# Altium PCB DSP5509_CIII.PcbDoc
Units mil, origin at the board's own origin, x right, y up, seen from the top; angles counter-clockwise.
Board outline 6000 x 4000 mil, 2 copper layers (Top Layer, Bottom Layer); 301 components, 272 nets, 1049 pads, 16 vias.
Unrouted connection lines stored in the file: 717.
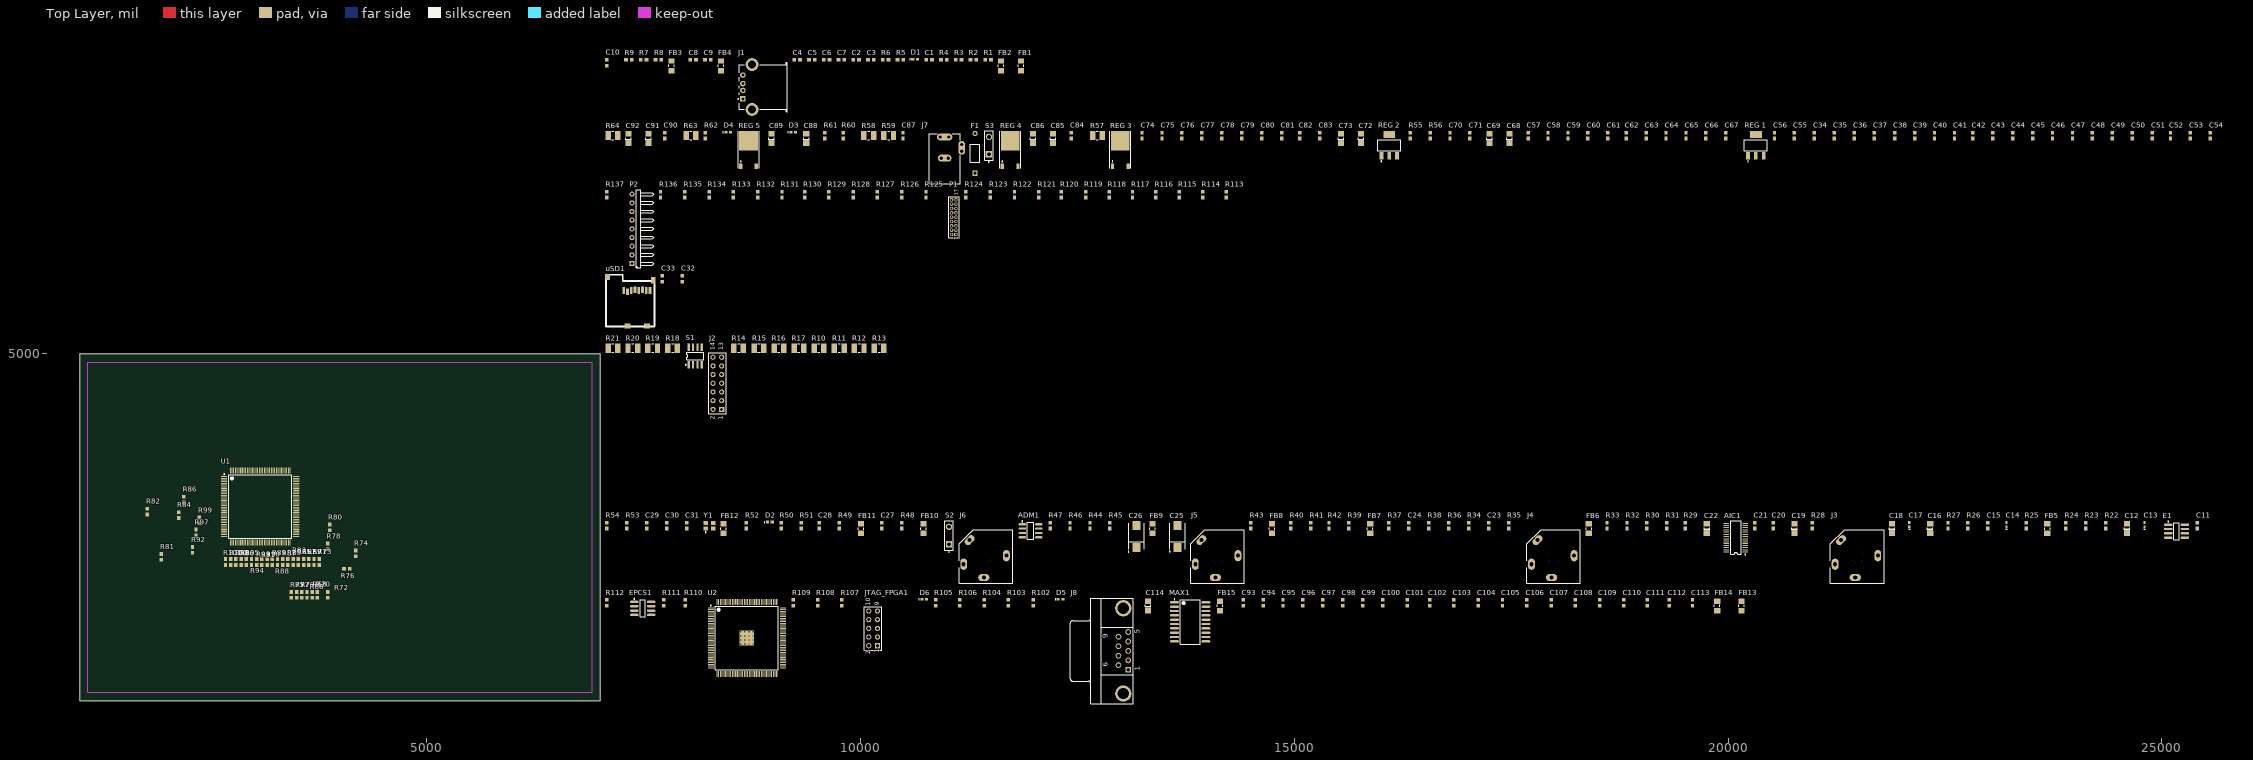
[diagram p0: Top Layer view]
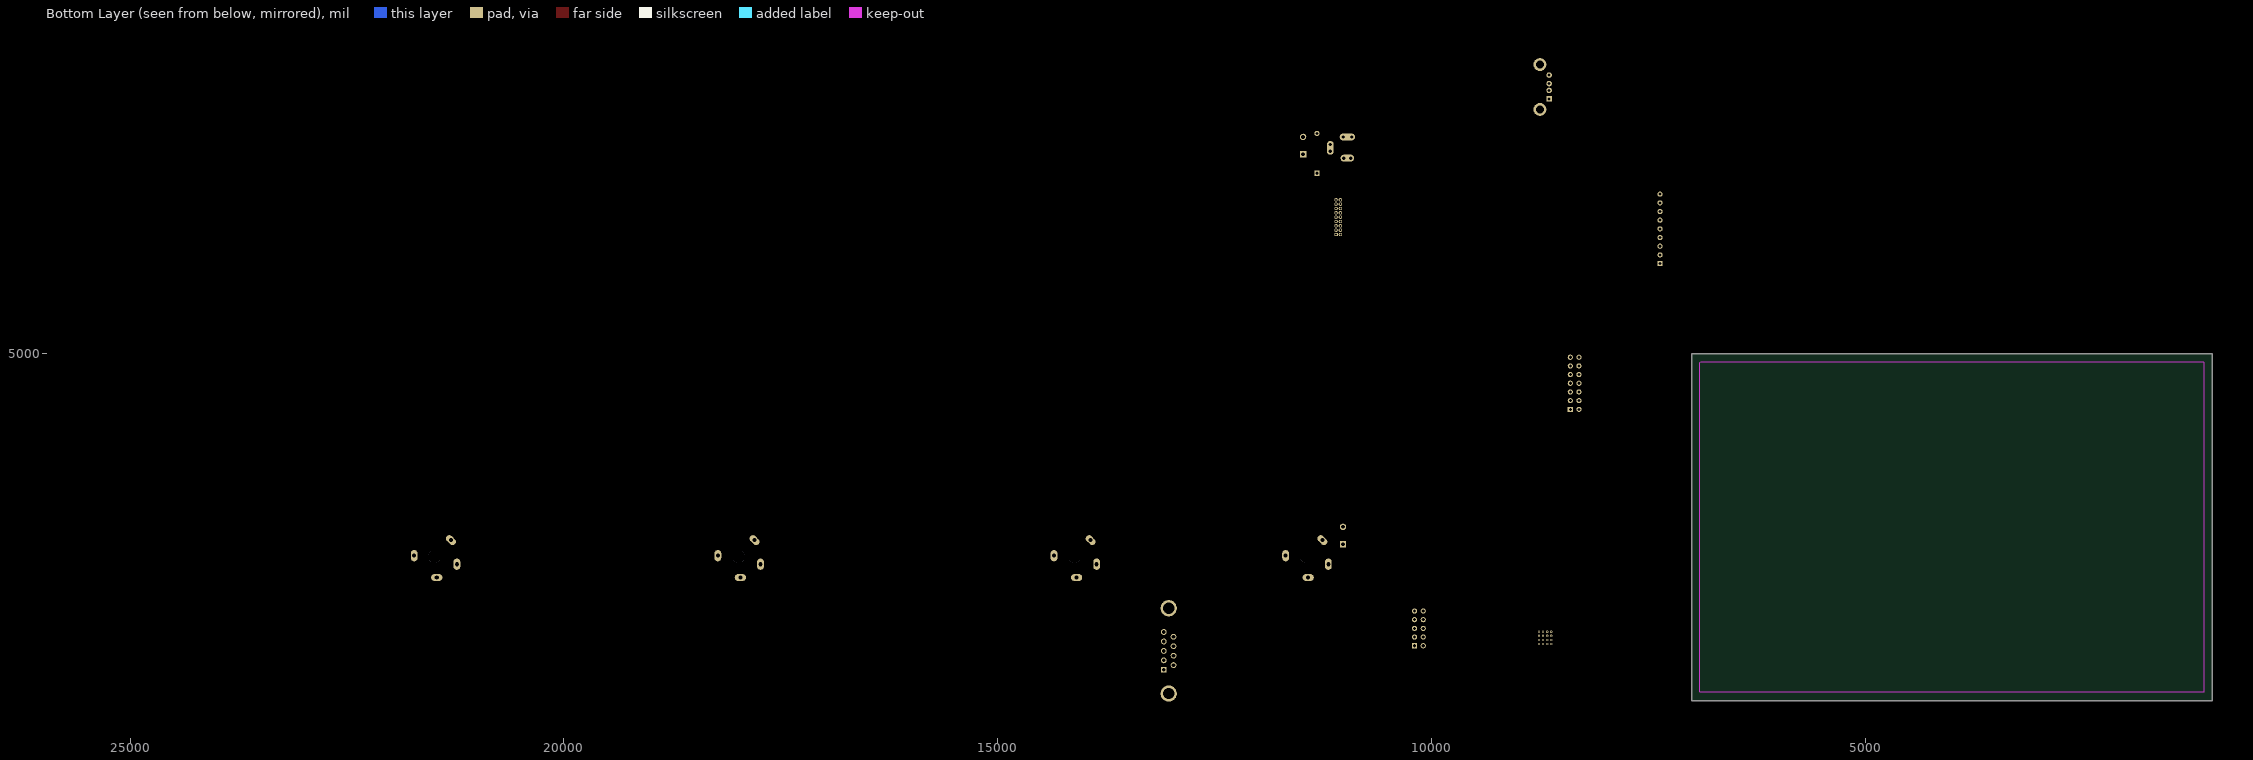
[diagram p1: Bottom Layer view, seen from below]

## Layer stack, top to bottom
Top Layer: signal copper 1.4
Dielectric: dielectric 12.6, FR-4, Dk 4.8
Bottom Layer: signal copper 1.4

## Board outline
1000,1000 7000,1000 7000,5000 1000,5000

## Design rules (kind name [scope] priority, off if disabled: settings)
Clearance [All] p1: gap=10
PolygonConnect [All] p1: connectstyle=Relief reliefconductorwidth=10 reliefentries=4 polygonreliefangle="90 Angle"
RoomDefinition USB [InComponentClass('USB')] p1: confinementstyle=ConfineIn formatcopy=TRUE lockcomponents=FALSE outline 7045,7730 11980,7730 11980,8520 7045,8520
RoomDefinition power [InComponentClass('power')] p2: confinementstyle=ConfineIn formatcopy=TRUE lockcomponents=FALSE outline 7045,6950 25725,6950 25725,7680 7045,7680
RoomDefinition output [InComponentClass('output')] p3: confinementstyle=ConfineIn formatcopy=TRUE lockcomponents=FALSE outline 7045,5980 14420,5980 14420,7000 7045,7000
RoomDefinition MMC [InComponentClass('MMC')] p4: confinementstyle=ConfineIn formatcopy=TRUE lockcomponents=FALSE outline 7045,5280 8110,5280 8110,6030 7045,6030
RoomDefinition JTAG_DSP [InComponentClass('JTAG_DSP')] p5: confinementstyle=ConfineIn formatcopy=TRUE lockcomponents=FALSE outline 7045,4225 10315,4225 10315,5230 7045,5230
RoomDefinition INTERFACE [InComponentClass('INTERFACE')] p6: confinementstyle=ConfineIn formatcopy=TRUE lockcomponents=FALSE outline 7045,3235 16520,3235 16520,4275 7045,4275
RoomDefinition INT_Reset_CLK [InComponentClass('INT_Reset_CLK')] p7: confinementstyle=ConfineIn formatcopy=TRUE lockcomponents=FALSE outline 7045,2345 25545,2345 25545,3185 7045,3185
RoomDefinition FPGA_JTAG [InComponentClass('FPGA_JTAG')] p8: confinementstyle=ConfineIn formatcopy=TRUE lockcomponents=FALSE outline 7045,955 20355,955 20355,7000 7045,7000
RoutingVias [All] p1: holewidth=28 width=50 viastyle="Through Hole" minholewidth=28 minwidth=50 maxholewidth=28 maxwidth=50
SolderMaskExpansion [All] p1: expansion=4
TestPointUsage [All] p1: valid=0 allowmultiple=FALSE
Testpoint [All] p1: side=15 testpointundercomponent=TRUE minsize=40 maxsize=100 preferedsize=60 minholesize=0 maxholesize=40 preferedholesize=32 testpointgrid=1 style=1023 order=0-112345678
Width [All] p1: maxlimit=10 minlimit=10 preferedwidth=10
19 further rules are at their usual default settings.

## Classes and differential pairs
component class FPGA_JTAG: C93 C94 C95 C96 C97 C98 C99 C100 C101 C102 C103 C104 C105 C106 C107 C108 C109 C110 C111 C112 C113 C114 D5 D6 EPCS1 FB13 FB14 FB15 J8 JTAG_FPGA1 MAX1 MAX233 R102 R103 R104 R105 R106 R107 R108 R109 R110 R111 R112 R113 R114 R115 R116 R117 R118 R119 U2
component class INT_Reset_CLK: ADM1 AIC1 C11 C12 C13 C14 C15 C16 C17 C18 C19 C20 C21 C22 C23 C24 C25 C26 C27 C28 C29 C30 C31 D2 E1 FB5 FB6 FB7 FB8 FB9 FB10 FB11 FB12 J3 J4 J5 J6 R22 R23 R24 R25 R26 R27 R28 R29 R30 R31 R32 R33 R34 R35 R36 R37 R38 R39 R40 R41 R42 R43 R44 R45 R46 R47 R48 R49 R50 R51 R52 R53 R54 S2 Y1
component class INTERFACE: R65 R66 R67 R68 R69 R70 R71 R72 R73 R74 R75 R76 R77 R78 R79 R80 R81 R82 R83 R84 R85 R86 R87 R88 R89 R90 R91 R92 R93 R94 R95 R96 R97 R98 R99 R100 R101 U1
component class JTAG_DSP: J2 R10 R11 R12 R13 R14 R15 R16 R17 R18 R19 R20 R21 S1
component class MMC: C32 C33 uSD1
component class output: P1 P2 R113 R114 R115 R116 R117 R118 R119 R120 R121 R122 R123 R124 R125 R126 R127 R128 R129 R130 R131 R132 R133 R134 R135 R136 R137 R138 R139 R140 R141 R142 R143 R144
component class power: C34 C35 C36 C37 C38 C39 C40 C41 C42 C43 C44 C45 C46 C47 C48 C49 C50 C51 C52 C53 C54 C55 C56 C57 C58 C59 C60 C61 C62 C63 C64 C65 C66 C67 C68 C69 C70 C71 C72 C73 C74 C75 C76 C77 C78 C79 C80 C81 C82 C83 C84 C85 C86 C87 C88 C89 C90 C91 C92 D3 D4 F1 J7 R55 R56 R57 R58 R59 R60 R61 R62 R63 R64 "REG 1" "REG 2" "REG 3" "REG 4" "REG 5" S3
component class USB: C1 C2 C3 C4 C5 C6 C7 C8 C9 C10 D1 FB1 FB2 FB3 FB4 J1 R1 R2 R3 R4 R5 R6 R7 R8 R9

## Components (designator, comment, footprint, x,y, rotation, side; value= is the part's Value field where it differs from the comment)
ADM1 "ADM706RAR" R-8_N 11960,2960 r0 top
AIC1 "TLV320AIC23BIPW" TSSOP28 20090,2880 r90 top
C1 "Cap Semi" 1608[0603] 10790,8390 r0 top
C2 "Cap Semi" 1608[0603] 9950,8390 r0 top
C3 "Cap Semi" 1608[0603] 10120,8390 r0 top
C4 "Cap Semi" 1608[0603] 9270,8390 r0 top
C5 "Cap Semi" 1608[0603] 9440,8390 r0 top
C6 "Cap Semi" 1608[0603] 9610,8390 r0 top
C7 "Cap Semi" 1608[0603] 9780,8390 r0 top
C8 "Cap Semi" 1608[0603] 8070,8390 r0 top
C9 "Cap Semi" 1608[0603] 8240,8390 r0 top
C10 "Cap Semi" 1608[0603] 7075,8355 r90 top
C11 "Cap Semi" 1608[0603] 25410,3020 r90 top
C12 "Cap Pol3" c1206 24600,2985 r90 top
C13 "Cap Semi" 0402 24800,3030 r90 top
C14 "Cap Semi" 0402 23210,3030 r90 top
C15 "Cap Semi" 1608[0603] 22995,3020 r90 top
C16 "Cap Pol3" c1206 22330,2985 r90 top
C17 "Cap Semi" 0402 22090,3030 r90 top
C18 "Cap Pol3" c1206 21890,2985 r90 top
C19 "Cap Pol3" c1206 20765,2985 r90 top
C20 "Cap Semi" 1608[0603] 20520,3020 r90 top
C21 "Cap Semi" 1608[0603] 20310,3020 r90 top
C22 "Cap Pol3" c1206 19755,2985 r90 top
C23 "Cap Semi" 1608[0603] 17240,3020 r90 top
C24 "Cap Semi" 1608[0603] 16320,3020 r90 top
C25 "Cap Pol3" TC7343-2917 13655,2895 r90 top
C26 "Cap Pol3" TC7343-2917 13180,2895 r90 top
C27 "Cap Semi" 1608[0603] 10245,3020 r90 top
C28 "Cap Semi" 1608[0603] 9525,3020 r90 top
C29 "Cap Semi" 1608[0603] 7535,3020 r90 top
C30 "Cap Semi" 1608[0603] 7765,3020 r90 top
C31 "Cap Semi" 1608[0603] 7995,3020 r90 top
C32 "Cap Semi" 1608[0603] 7945,5865 r90 top
C33 "Cap Semi" 1608[0603] 7715,5865 r90 top
C34 "Cap Semi" 1608[0603] 20995,7515 r90 top
C35 "Cap Semi" 1608[0603] 21225,7515 r90 top
C36 "Cap Semi" 1608[0603] 21455,7515 r90 top
C37 "Cap Semi" 1608[0603] 21685,7515 r90 top
C38 "Cap Semi" 1608[0603] 21920,7515 r90 top
C39 "Cap Semi" 1608[0603] 22150,7515 r90 top
C40 "Cap Semi" 1608[0603] 22380,7515 r90 top
C41 "Cap Semi" 1608[0603] 22610,7515 r90 top
C42 "Cap Semi" 1608[0603] 22820,7515 r90 top
C43 "Cap Semi" 1608[0603] 23050,7515 r90 top
C44 "Cap Semi" 1608[0603] 23280,7515 r90 top
C45 "Cap Semi" 1608[0603] 23510,7515 r90 top
C46 "Cap Semi" 1608[0603] 23740,7515 r90 top
C47 "Cap Semi" 1608[0603] 23970,7515 r90 top
C48 "Cap Semi" 1608[0603] 24200,7515 r90 top
C49 "Cap Semi" 1608[0603] 24430,7515 r90 top
C50 "Cap Semi" 1608[0603] 24660,7515 r90 top
C51 "Cap Semi" 1608[0603] 24890,7515 r90 top
C52 "Cap Semi" 1608[0603] 25100,7515 r90 top
C53 "Cap Semi" 1608[0603] 25330,7515 r90 top
C54 "Cap Semi" 1608[0603] 25560,7515 r90 top
C55 "Cap Semi" 1608[0603] 20765,7515 r90 top
C56 "Cap Semi" 1608[0603] 20535,7515 r90 top
C57 "Cap Semi" 1608[0603] 17695,7515 r90 top
C58 "Cap Semi" 1608[0603] 17925,7515 r90 top
C59 "Cap Semi" 1608[0603] 18155,7515 r90 top
C60 "Cap Semi" 1608[0603] 18385,7515 r90 top
C61 "Cap Semi" 1608[0603] 18615,7515 r90 top
C62 "Cap Semi" 1608[0603] 18825,7515 r90 top
C63 "Cap Semi" 1608[0603] 19055,7515 r90 top
C64 "Cap Semi" 1608[0603] 19285,7515 r90 top
C65 "Cap Semi" 1608[0603] 19515,7515 r90 top
C66 "Cap Semi" 1608[0603] 19745,7515 r90 top
C67 "Cap Semi" 1608[0603] 19975,7515 r90 top
C68 "Cap Pol3" C1206 17480,7480 r90 top
C69 "Cap Pol3" C1206 17250,7480 r90 top
C70 "Cap Semi" 1608[0603] 16795,7515 r90 top
C71 "Cap Semi" 1608[0603] 17025,7515 r90 top
C72 "Cap Pol3" C1206 15770,7480 r90 top
C73 "Cap Pol3" C1206 15540,7480 r90 top
C74 "Cap Semi" 1608[0603] 13245,7515 r90 top
C75 "Cap Semi" 1608[0603] 13475,7515 r90 top
C76 "Cap Semi" 1608[0603] 13705,7515 r90 top
C77 "Cap Semi" 1608[0603] 13935,7515 r90 top
C78 "Cap Semi" 1608[0603] 14165,7515 r90 top
C79 "Cap Semi" 1608[0603] 14395,7515 r90 top
C80 "Cap Semi" 1608[0603] 14625,7515 r90 top
C81 "Cap Semi" 1608[0603] 14855,7515 r90 top
C82 "Cap Semi" 1608[0603] 15065,7515 r90 top
C83 "Cap Semi" 1608[0603] 15295,7515 r90 top
C84 "Cap Semi" 1608[0603] 12430,7515 r90 top
C85 "Cap Pol3" C1206 12220,7480 r90 top
C86 "Cap Pol3" C1206 11990,7480 r90 top
C87 "Cap Semi" 1608[0603] 10490,7515 r90 top
C88 "Cap Pol3" C1206 9375,7480 r90 top
C89 "Cap Pol3" C1206 8975,7480 r90 top
C90 "Cap Semi" 1608[0603] 7745,7515 r90 top
C91 "Cap Pol3" C1206 7555,7480 r90 top
C92 "Cap Pol3" C1206 7325,7480 r90 top
C93 "Cap Semi" 1608[0603] 14410,2130 r90 top
C94 "Cap Semi" 1608[0603] 14640,2130 r90 top
C95 "Cap Semi" 1608[0603] 14870,2130 r90 top
C96 "Cap Semi" 1608[0603] 15100,2130 r90 top
C97 "Cap Semi" 1608[0603] 15330,2130 r90 top
C98 "Cap Semi" 1608[0603] 15560,2130 r90 top
C99 "Cap Semi" 1608[0603] 15790,2130 r90 top
C100 "Cap Semi" 1608[0603] 16020,2130 r90 top
C101 "Cap Semi" 1608[0603] 16300,2130 r90 top
C102 "Cap Semi" 1608[0603] 16560,2130 r90 top
C103 "Cap Semi" 1608[0603] 16840,2130 r90 top
C104 "Cap Semi" 1608[0603] 17120,2130 r90 top
C105 "Cap Semi" 1608[0603] 17400,2130 r90 top
C106 "Cap Semi" 1608[0603] 17680,2130 r90 top
C107 "Cap Semi" 1608[0603] 17960,2130 r90 top
C108 "Cap Semi" 1608[0603] 18240,2130 r90 top
C109 "Cap Semi" 1608[0603] 18520,2130 r90 top
C110 "Cap Semi" 1608[0603] 18800,2130 r90 top
C111 "Cap Semi" 1608[0603] 19070,2130 r90 top
C112 "Cap Semi" 1608[0603] 19320,2130 r90 top
C113 "Cap Semi" 1608[0603] 19590,2130 r90 top
C114 "Cap Pol3" C1206 13315,2095 r90 top
D1 "6.2V" L0603 10630,8395 r0 top
D2 "LED3" L0603 8955,3060 r0 top
D3 "12V" L0603 9225,7555 r0 top
D4 "LED3" L0603 8475,7555 r0 top
D5 "LED3" L0603 12305,2170 r0 top
D6 "LED3" L0603 10735,2170 r0 top
E1 "EEPROM-25f1024" SOIC-8 25170,2955 r0 top
EPCS1 "EPCS4SI8N" SOIC8_M 7490,2065 r0 top
F1 "Fuse 1" PIN-W2/E2.8 11320,7310 r90 top
FB1 "Ferrite Bead" 3216[1206] 11850,8320 r90 top
FB2 "Ferrite Bead" 3216[1206] 11620,8320 r90 top
FB3 "Ferrite Bead" 3216[1206] 7820,8320 r90 top
FB4 "Ferrite Bead" 3216[1206] 8390,8320 r90 top
FB5 "Ferrite Bead" 3216[1206] 23680,2985 r90 top
FB6 "Ferrite Bead" 3216[1206] 18395,2985 r90 top
FB7 "Ferrite Bead" 3216[1206] 15875,2985 r90 top
FB8 "Ferrite Bead" 3216[1206] 14745,2985 r90 top
FB9 "Ferrite Bead" 3216[1206] 13365,2985 r90 top
FB10 "Ferrite Bead" 3216[1206] 10725,2985 r90 top
FB11 "Ferrite Bead" 3216[1206] 10005,2985 r90 top
FB12 "Ferrite Bead" 3216[1206] 8420,2985 r90 top
FB13 "Ferrite Bead" 3216[1206] 20155,2095 r90 top
FB14 "Ferrite Bead" 3216[1206] 19875,2095 r90 top
FB15 "Ferrite Bead" 3216[1206] 14145,2095 r90 top
J1 "440068-1" 440068 9155,8075 r0 top
J2 "JTAG Header" HDR2X7 8400,4360 r90 top
J3 "Microphone In" JACK/6-V4A 21490,2665 r0 top
J4 "Line In" JACK/6-V4A 17990,2665 r0 top
J5 "Head Phone Out" JACK/6-V4A 14115,2665 r0 top
J6 "Line Out" JACK/6-V4A 11445,2665 r0 top
J7 "PWR2.5" KLD-0202 10970,6960 r90 top
J8 "D Connector 9" DSUB1.385-2H9 12655,1575 r90 top
JTAG_FPGA1 "Header 5X2" HDR2X5 10195,1635 r90 top
MAX1 "MAX233AEWP" WSO20_M 13800,1910 r0 top
P1 "MHDR2X9" MHDR2X9 11100,6375 r90 top
P2 "Header 9H" HDR1X9H 7365,6040 r90 top
R1 "Res3" J1-0603 11470,8390 r0 top
R2 "Res3" J1-0603 11300,8390 r0 top
R3 "Res3" J1-0603 11130,8390 r0 top
R4 "Res3" J1-0603 10960,8390 r0 top
R5 "Res3" J1-0603 10460,8390 r0 top
R6 "Res3" J1-0603 10290,8390 r0 top
R7 "Res3" J1-0603 7500,8390 r0 top
R8 "Res3" J1-0603 7670,8390 r0 top
R9 "Res3" J1-0603 7330,8390 r0 top
R10 "Res3" 3225[1210] 9520,5065 r0 top
R11 "Res3" 3225[1210] 9755,5065 r0 top
R12 "Res3" 3225[1210] 9985,5065 r0 top
R13 "Res3" 3225[1210] 10215,5065 r0 top
R14 "Res3" 3225[1210] 8595,5065 r0 top
R15 "Res3" 3225[1210] 8830,5065 r0 top
R16 "Res3" 3225[1210] 9060,5065 r0 top
R17 "Res3" 3225[1210] 9290,5065 r0 top
R18 "Res3" 3225[1210] 7835,5065 r0 top
R19 "Res3" 3225[1210] 7605,5065 r0 top
R20 "Res3" 3225[1210] 7375,5065 r0 top
R21 "Res3" 3225[1210] 7145,5065 r0 top
R22 "Res3" J1-0603 24355,3020 r90 top
R23 "Res3" J1-0603 24125,3020 r90 top
R24 "Res3" J1-0603 23895,3020 r90 top
R25 "Res3" J1-0603 23435,3020 r90 top
R26 "Res3" J1-0603 22765,3020 r90 top
R27 "Res3" J1-0603 22535,3020 r90 top
R28 "Res3" J1-0603 20970,3020 r90 top
R29 "Res3" J1-0603 19505,3020 r90 top
R30 "Res3" J1-0603 19065,3020 r90 top
R31 "Res3" J1-0603 19295,3020 r90 top
R32 "Res3" J1-0603 18835,3020 r90 top
R33 "Res3" J1-0603 18605,3020 r90 top
R34 "Res3" J1-0603 17010,3020 r90 top
R35 "Res3" J1-0603 17470,3020 r90 top
R36 "Res3" J1-0603 16780,3020 r90 top
R37 "Res3" J1-0603 16090,3020 r90 top
R38 "Res3" J1-0603 16550,3020 r90 top
R39 "Res3" J1-0603 15630,3020 r90 top
R40 "Res3" J1-0603 14960,3020 r90 top
R41 "Res3" J1-0603 15190,3020 r90 top
R42 "Res3" J1-0603 15400,3020 r90 top
R43 "Res3" J1-0603 14500,3020 r90 top
R44 "Res3" J1-0603 12645,3020 r90 top
R45 "Res3" J1-0603 12875,3020 r90 top
R46 "Res3" J1-0603 12415,3020 r90 top
R47 "Res3" J1-0603 12185,3020 r90 top
R48 "Res3" J1-0603 10475,3020 r90 top
R49 "Res3" J1-0603 9755,3020 r90 top
R50 "Res3" J1-0603 9085,3020 r90 top
R51 "Res3" J1-0603 9315,3020 r90 top
R52 "Res3" J1-0603 8685,3020 r90 top
R53 "Res3" J1-0603 7305,3020 r90 top
R54 "Res3" J1-0603 7075,3020 r90 top
R55 "Res3" J1-0603 16335,7515 r90 top
R56 "Res3" J1-0603 16565,7515 r90 top
R57 "Res3" 3225[1210] 12730,7515 r0 top
R58 "Res3" 3225[1210] 10095,7515 r0 top
R59 "Res3" 3225[1210] 10325,7515 r0 top
R60 "Res3" J1-0603 9800,7515 r90 top
R61 "Res3" J1-0603 9590,7515 r90 top
R62 "Res3" J1-0603 8210,7515 r90 top
R63 "Res3" 3225[1210] 8045,7515 r0 top
R64 "Res3" 3225[1210] 7145,7515 r0 top
R65 "Res3" J1-0603 3520,2600 r90 top
R66 "Res3" J1-0603 3620,2220 r270 top
R67 "Res3" J1-0603 3580,2600 r90 top
R68 "Res3" J1-0603 3680,2220 r270 top
R69 "Res3" J1-0603 3640,2600 r90 top
R70 "Res3" J1-0603 3740,2220 r270 top
R71 "Res3" J1-0603 3700,2600 r90 top
R72 "Res3" J1-0603 3860,2220 r270 top
R73 "Res3" J1-0603 3760,2600 r90 top
R74 "Res3" J1-0603 4180,2700 r90 top
R75 "Res3" J1-0603 3440,2220 r90 top
R76 "Res3" J1-0603 4080,2520 r0 top
R77 "Res3" J1-0603 3500,2220 r90 top
R78 "Res3" J1-0603 3860,2780 r90 top
R79 "Res3" J1-0603 3560,2220 r90 top
R80 "Res3" J1-0603 3880,3000 r90 top
R81 "Res3" J1-0603 1940,2660 r90 top
R82 "Res3" J1-0603 1780,3180 r90 top
R83 "Res3" J1-0603 3460,2600 r270 top
R84 "Res3" J1-0603 2140,3140 r90 top
R85 "Res3" J1-0603 3400,2600 r270 top
R86 "Res3" J1-0603 2200,3320 r90 top
R87 "Res3" J1-0603 3340,2600 r270 top
R88 "Res3" J1-0603 3280,2600 r270 top
R89 "Res3" J1-0603 3220,2600 r270 top
R90 "Res3" J1-0603 3160,2600 r270 top
R91 "Res3" J1-0603 3100,2600 r270 top
R92 "Res3" J1-0603 2300,2740 r90 top
R93 "Res3" J1-0603 3040,2600 r270 top
R94 "Res3" J1-0603 2980,2600 r270 top
R95 "Res3" J1-0603 2920,2600 r270 top
R96 "Res3" J1-0603 2860,2600 r270 top
R97 "Res3" J1-0603 2340,2940 r90 top
R98 "Res3" J1-0603 2800,2600 r270 top
R99 "Res3" J1-0603 2380,3080 r90 top
R100 "Res3" J1-0603 2740,2600 r270 top
R101 "Res3" J1-0603 2680,2600 r270 top
R102 "Res3" J1-0603 11990,2130 r90 top
R103 "Res3" J1-0603 11705,2130 r90 top
R104 "Res3" J1-0603 11425,2130 r90 top
R105 "Res3" J1-0603 10865,2130 r90 top
R106 "Res3" J1-0603 11145,2130 r90 top
R107 "Res3" J1-0603 9785,2130 r90 top
R108 "Res3" J1-0603 9505,2130 r90 top
R109 "Res3" J1-0603 9225,2130 r90 top
R110 "Res3" J1-0603 7980,2130 r90 top
R111 "Res3" J1-0603 7730,2130 r90 top
R112 "Res3" J1-0603 7075,2130 r90 top
R113 "Res3" J1-0603 14215,6835 r90 top
R114 "Res3" J1-0603 13945,6835 r90 top
R115 "Res3" J1-0603 13675,6835 r90 top
R116 "Res3" J1-0603 13405,6835 r90 top
R117 "Res3" J1-0603 13135,6835 r90 top
R118 "Res3" J1-0603 12865,6835 r90 top
R119 "Res3" J1-0603 12595,6835 r90 top
R120 "Res3" J1-0603 12315,6835 r90 top
R121 "Res3" J1-0603 12055,6835 r90 top
R122 "Res3" J1-0603 11775,6835 r90 top
R123 "Res3" J1-0603 11495,6835 r90 top
R124 "Res3" J1-0603 11215,6835 r90 top
R125 "Res3" J1-0603 10755,6835 r90 top
R126 "Res3" J1-0603 10475,6835 r90 top
R127 "Res3" J1-0603 10195,6835 r90 top
R128 "Res3" J1-0603 9915,6835 r90 top
R129 "Res3" J1-0603 9635,6835 r90 top
R130 "Res3" J1-0603 9355,6835 r90 top
R131 "Res3" J1-0603 9095,6835 r90 top
R132 "Res3" J1-0603 8815,6835 r90 top
R133 "Res3" J1-0603 8535,6835 r90 top
R134 "Res3" J1-0603 8255,6835 r90 top
R135 "Res3" J1-0603 7975,6835 r90 top
R136 "Res3" J1-0603 7695,6835 r90 top
R137 "Res3" J1-0603 7075,6835 r90 top
"REG 1" "FAN1086" SOT223 20320,7405 r0 top
"REG 2" "FAN1112" SOT223 16095,7405 r0 top
"REG 3" "LM317MDTRK" 369A-13 12995,7310 r0 top
"REG 4" "LD1085CDT" 369A-13 11725,7310 r0 top
"REG 5" "LM317MDTRK" 369A-13 8710,7310 r0 top
S1 "SW DIP-4" SO8 8095,4975 r0 top
S2 "SW-PB" SPST-2 11020,2905 r90 top
S3 "SW-SPST" SPST-2 11480,7400 r90 top
U1 "TMS320VC5509APGE" TMSVC5509APGA 3080,3240 r0 top
U2 "EP3C5E144C8N" EQFP144_N 8690,1725 r0 top
uSD1 "micro SD" MICRO_SD_SOCKET 7345,5575 r0 top
Y1 "CFPX-5" CFPX-5 8260,3020 r0 top

## Footprints (in the part's own frame and the unit in brackets; to place one, negate y for a bottom-side part, rotate by r counter-clockwise, add the part's x,y. Pads: shape width x height; smd on the part's side, far side on the other; paste and mask are expansions set on the pad)
369A-13 [mm] "D-PAK/TO-252-AA; 3 Leads (1 Cropped); Body 10.3 (inc. leads) x 6.7 mm (LxW max)"
  rect 1x1.6 smd: 1(-2.285,-3.7) 3(2.285,-3.7)
  rect 5.5x5.7 smd: 4(0,3.7)
  silkscreen extent -3.09,-4.4 3.09,6.45
0402 [mm] "Chip Capacitor; Body 1.0 x 0.5 mm (LxW typ)"
  rect 0.9x0.7 smd: 1(-0.65,0) 2(0.65,0)
  silkscreen extent -1.4,-0.25 -1.4,0.25
1608[0603] [mm] "Chip Capacitor; Body 1.6 x 0.8 mm (LxW typ)"
  rect 1.1x1 smd: 1(-0.85,0) 2(0.85,0)
3216[1206] [mm] "Chip Resistor; Body 3.2 x 1.6 mm (LxW typ)"
  rect 1.6x1.8 smd: 1(-1.4,0) 2(1.4,0)
  silkscreen extent -0.3,-0.8 0.3,0.8
3225[1210] [mm] "Chip Resistor; Body 3.2 x 2.5 mm (LxW typ)"
  rect 1.6x2.7 smd: 1(-1.4,0) 2(1.4,0)
  silkscreen extent -0.3,-1.25 0.3,1.25
440068 [mm] "Connector; USB1.1, Reverse Type, Thru-Hole; 4 Position; Right Angle"
  rect 1.6x1.6 hole 0.92: 1(-12.99,-3.5)
  round 1.6 hole 0.92: 2(-12.99,-1) 3(-12.99,1) 4(-12.99,3.5)
  round 3.8 hole 2.3: 5(-10.28,6.57) 6(-10.28,-6.57)
  silkscreen extent -14.46,-7.25 0,7.25
c1206 [mm] "Chip Capacitor; Body 3.2 x 1.6 mm (LxW typ)"
  rect 1.6x1.8 smd: 1(-1.4,0) 2(1.4,0)
  silkscreen extent -0.3,-0.8 0.3,0.8
C1206 [mm] "Chip Capacitor; Body 3.2 x 1.6 mm (LxW typ)"
  rect 1.6x1.8 smd: 1(-1.4,0) 2(1.4,0)
  silkscreen extent -0.3,-0.8 0.3,0.8
CFPX-5 [mm] "Surface Mount Quartz Crystal; Body 3.4 x 2.7 mm (LxW max)"
  rect 1.4x1.15 smd: 1(-1.1,-0.8) 2(1.1,-0.8) 3(1.1,0.8) 4(-1.1,0.8)
  silkscreen extent -1.27,-2.09 -1.02,-1.84
DSUB1.385-2H9 [mm] "Connector; D Subminiature; 9 Position; Right Angle; Pitch 1.385 mm"
  rect 1.69x1.69 hole 1.09: 1(-5.54,-10.92)
  round 1.69 hole 1.09: 2(-2.77,-10.92) 3(0,-10.92) 4(2.77,-10.92) 5(5.54,-10.92) 6(-4.155,-8.08) 7(-1.385,-8.08) 8(1.385,-8.08) 9(4.155,-8.08)
  round 4.76 hole 3.26: 10(-12.495,-9.5) 11(12.495,-9.5)
  silkscreen extent -15.4,-12.4 15.4,6
EQFP144_N [mm] "Thin QFP, 144-Leads, Body 20x20mm, Pitch 0.5mm, IPC Medium Density"
  oval 1.8x0.3 smd: 1(-10.55,8.75) 2(-10.55,8.25) 3(-10.55,7.75) 4(-10.55,7.25) 5(-10.55,6.75) 6(-10.55,6.25) 7(-10.55,5.75) 8(-10.55,5.25) 9(-10.55,4.75) 10(-10.55,4.25) 11(-10.55,3.75) 12(-10.55,3.25) 13(-10.55,2.75) 14(-10.55,2.25) 15(-10.55,1.75) 16(-10.55,1.25) 17(-10.55,0.75) 18(-10.55,0.25) 19(-10.55,-0.25) 20(-10.55,-0.75) 21(-10.55,-1.25) 22(-10.55,-1.75) 23(-10.55,-2.25) 24(-10.55,-2.75) 25(-10.55,-3.25) 26(-10.55,-3.75) 27(-10.55,-4.25) 28(-10.55,-4.75) 29(-10.55,-5.25) 30(-10.55,-5.75) 31(-10.55,-6.25) 32(-10.55,-6.75) 33(-10.55,-7.25) 34(-10.55,-7.75) 35(-10.55,-8.25) 36(-10.55,-8.75) 73(10.55,-8.75) 74(10.55,-8.25) 75(10.55,-7.75) 76(10.55,-7.25) 77(10.55,-6.75) 78(10.55,-6.25) 79(10.55,-5.75) 80(10.55,-5.25) 81(10.55,-4.75) 82(10.55,-4.25) 83(10.55,-3.75) 84(10.55,-3.25) 85(10.55,-2.75) 86(10.55,-2.25) 87(10.55,-1.75) 88(10.55,-1.25) 89(10.55,-0.75) 90(10.55,-0.25) 91(10.55,0.25) 92(10.55,0.75) 93(10.55,1.25) 94(10.55,1.75) 95(10.55,2.25) 96(10.55,2.75) 97(10.55,3.25) 98(10.55,3.75) 99(10.55,4.25) 100(10.55,4.75) 101(10.55,5.25) 102(10.55,5.75) 103(10.55,6.25) 104(10.55,6.75) 105(10.55,7.25) 106(10.55,7.75) 107(10.55,8.25) 108(10.55,8.75)
  oval 0.3x1.8 smd: 37(-8.75,-10.55) 38(-8.25,-10.55) 39(-7.75,-10.55) 40(-7.25,-10.55) 41(-6.75,-10.55) 42(-6.25,-10.55) 43(-5.75,-10.55) 44(-5.25,-10.55) 45(-4.75,-10.55) 46(-4.25,-10.55) 47(-3.75,-10.55) 48(-3.25,-10.55) 49(-2.75,-10.55) 50(-2.25,-10.55) 51(-1.75,-10.55) 52(-1.25,-10.55) 53(-0.75,-10.55) 54(-0.25,-10.55) 55(0.25,-10.55) 56(0.75,-10.55) 57(1.25,-10.55) 58(1.75,-10.55) 59(2.25,-10.55) 60(2.75,-10.55) 61(3.25,-10.55) 62(3.75,-10.55) 63(4.25,-10.55) 64(4.75,-10.55) 65(5.25,-10.55) 66(5.75,-10.55) 67(6.25,-10.55) 68(6.75,-10.55) 69(7.25,-10.55) 70(7.75,-10.55) 71(8.25,-10.55) 72(8.75,-10.55) 109(8.75,10.55) 110(8.25,10.55) 111(7.75,10.55) 112(7.25,10.55) 113(6.75,10.55) 114(6.25,10.55) 115(5.75,10.55) 116(5.25,10.55) 117(4.75,10.55) 118(4.25,10.55) 119(3.75,10.55) 120(3.25,10.55) 121(2.75,10.55) 122(2.25,10.55) 123(1.75,10.55) 124(1.25,10.55) 125(0.75,10.55) 126(0.25,10.55) 127(-0.25,10.55) 128(-0.75,10.55) 129(-1.25,10.55) 130(-1.75,10.55) 131(-2.25,10.55) 132(-2.75,10.55) 133(-3.25,10.55) 134(-3.75,10.55) 135(-4.25,10.55) 136(-4.75,10.55) 137(-5.25,10.55) 138(-5.75,10.55) 139(-6.25,10.55) 140(-6.75,10.55) 141(-7.25,10.55) 142(-7.75,10.55) 143(-8.25,10.55) 144(-8.75,10.55)
  rect 4.3x4.3 smd: 145(0,0)
  silkscreen extent -10.67,-9.25 9.25,9.57, body extent -10,-10 10,10, height 1.6
HDR1X9H [mm] "Connector; Header; 9 Position; Right Angle"
  rect 1.5x1.5 hole 0.9: 1(0,0)
  round 1.5 hole 0.9: 2(2.54,0) 3(5.08,0) 4(7.62,0) 5(10.16,0) 6(12.7,0) 7(15.24,0) 8(17.78,0) 9(20.32,0)
  silkscreen extent -1.27,-6.35 21.59,-1.27
HDR2X5 [mm] "Connector; Header; 5x2 Position"
  rect 1.5x1.5 hole 0.9: 1(0,0)
  round 1.5 hole 0.9: 2(0,2.54) 3(2.54,0) 4(2.54,2.54) 5(5.08,0) 6(5.08,2.54) 7(7.62,0) 8(7.62,2.54) 9(10.16,0) 10(10.16,2.54)
  silkscreen extent -1.27,-1.27 11.43,3.81
HDR2X7 [mm]
  rect 1.5x1.5 hole 0.9: 1(0,0)
  round 1.5 hole 0.9: 2(0,2.54) 3(2.54,0) 4(2.54,2.54) 5(5.08,0) 6(5.08,2.54) 7(7.62,0) 8(7.62,2.54) 9(10.16,0) 10(10.16,2.54) 11(12.7,0) 12(12.7,2.54) 13(15.24,0) 14(15.24,2.54)
  silkscreen extent -1.27,-1.27 16.51,3.81
J1-0603 [mm] "Chip Resistor; Body 1.6 x 0.8 mm (LxW typ)"
  rect 1.1x1 smd: 1(-0.85,0) 2(0.85,0)
JACK/6-V4A [mm] "Connector; Jack Socket, 1/4\" [6.5mm], Thru-Hole, 4 Position, Vertical, Body 15.7 x 15.7 x 31 mm (WxTxH)"
  oval 2x3.3 hole 1.2: 1(6,0.2) 4(-6.5,-2.3)
  oval 3.3x2 hole 1.2: 3(-0.6,-6.2)
  oval 2x3.3 hole 1.2 rot 135: 5(-4.738,4.738)
  round 3.7 hole 4: MH1(0,0)
  silkscreen extent -7.85,-7.85 7.85,7.85
KLD-0202 [mm] "DC Power Jack, 2.5mm, KLD Series, PCB Mount"
  oval 2x4.5 all layers, no hole: 1(13.7,0)
  round 1.5 hole 1: 1A(13.7,-1.25) 1B(13.7,1.25) 2A(7.5,-1) 2B(7.5,1) 3A(9.5,-5) 3B(11.5,-5)
  oval 2x4 all layers, no hole: 2(7.5,0)
  oval 4x2 all layers, no hole: 3(10.5,-5)
  silkscreen extent 0,-4.5 14.6,4.5
L0603 [mm] "Chip Inductor; Body 1.6 x 0.8 mm (LxW typ)"
  rect 0.9x0.8 smd: 1(-0.7,0) 2(0.7,0)
  silkscreen extent -1.45,-0.3 -1.45,0.3
MHDR2X9 [mm] "Connector; Header; 9x2 Position"
  rect 1x1 hole 0.6: 1(0,0)
  round 1 hole 0.6: 2(0,1.27) 3(1.27,0) 4(1.27,1.27) 5(2.54,0) 6(2.54,1.27) 7(3.81,0) 8(3.81,1.27) 9(5.08,0) 10(5.08,1.27) 11(6.35,0) 12(6.35,1.27) 13(7.62,0) 14(7.62,1.27) 15(8.89,0) 16(8.89,1.27) 17(10.16,0) 18(10.16,1.27)
  silkscreen extent -0.9,-0.9 11.06,2.17
MICRO_SD_SOCKET [mm]
  rect 0.8x2 smd: 1(-1.905,3.937) 2(-0.805,3.537) 3(0.295,3.937) 4(1.395,4.137) 5(2.495,3.937) 6(3.595,4.137) 7(4.695,3.937) 8(5.795,3.937)
  rect 1.4x1.9 smd: 9(6.738,6.855)
  rect 1.8x1.4 smd: 10(4.953,-6.477) 11(-0.762,-6.477)
  rect 1.4x1.75 smd: 12(-6.604,7.874)
  silkscreen extent -7.1,-6.61 7.12,8.51
PIN-W2/E2.8 [mm] "Fuse; 2 Leads"
  rect 1.5x1.5 hole 0.9: 1(-5.825,0)
  round 1.5 hole 0.9: 2(5.825,0)
  silkscreen extent -2.65,-1.4 2.65,1.4
R-8_N [mm] "SOIC, 8-Leads, Body 4.9x3.9mm, Pitch 1.27mm, IPC Medium Density"
  oval 2.2x0.6 smd: 1(-2.4,1.905) 2(-2.4,0.635) 3(-2.4,-0.635) 4(-2.4,-1.905) 5(2.4,-1.905) 6(2.4,-0.635) 7(2.4,0.635) 8(2.4,1.905)
  silkscreen extent -2.52,-2.5 0.9,2.88, body extent -1.95,-2.45 1.95,2.45, height 1.75
SO8 [mm] "Small Outline; 8 Leads; Body Width 3.9 mm; Pitch 1.27 mm"
  rect 0.6x2.2 smd: 1(-1.905,-2.6) 2(-0.635,-2.6) 3(0.635,-2.6) 4(1.905,-2.6) 5(1.905,2.6) 6(0.635,2.6) 7(-0.635,2.6) 8(-1.905,2.6)
  silkscreen extent -2.88,-2.72 2.5,1.1
SOIC8_M [mm] "SOIC, 8-Leads, Body 4.9x3.9mm, Pitch 1.27mm, IPC Low Density"
  oval 2.5x0.7 smd: 1(-2.45,1.905) 2(-2.45,0.635) 3(-2.45,-0.635) 4(-2.45,-1.905) 5(2.45,-1.905) 6(2.45,-0.635) 7(2.45,0.635) 8(2.45,1.905)
  silkscreen extent -2.57,-2.5 0.8,2.93, body extent -2,-2.5 2,2.5, height 1.75
SOIC-8 [mm]
  oval 2.5x0.7 smd: 1(-2.45,1.905) 2(-2.45,0.635) 3(-2.45,-0.635) 4(-2.45,-1.905) 5(2.45,-1.905) 6(2.45,-0.635) 7(2.45,0.635) 8(2.45,1.905)
  silkscreen extent -2.57,-2.5 0.8,2.93, body extent -2,-2.5 2,2.5, height 1.73
SOT223 [mm] "SOT-223/SC-73; 4 Leads; Body 6.7 x 7.3 mm, inc. leads (LxW max)"
  rect 1.1x2.15 smd: 1(-2.3,-3.1) 2(0,-3.1) 3(2.3,-3.1)
  rect 3.5x2.15 smd: 4(0,3.1)
  silkscreen extent -3.35,-4.85 3.35,1.63
SPST-2 [mm] "Circuit Breaker; 2 Leads"
  rect 1.85x1.85 hole 1.1: 1(-2.54,0)
  round 1.85 hole 1.1: 2(2.54,0)
  silkscreen extent -4.89,-1.27 4.28,1.27
TC7343-2917 [mm] "Capacitor, SM Tantalum; Body 7.3 x 4.3 mm (LxW typ)"
  rect 2.6x2.4 smd: 1(-3.2,0) 2(3.2,0)
  silkscreen extent -4.57,-2.3 3.8,2.42
TMSVC5509APGA [mm] "Thin QFP, 144-Leads, Body 20x20mm, Pitch 0.5mm, IPC Medium Density"
  oval 1.8x0.3 smd: 1(-10.55,8.75) 2(-10.55,8.25) 3(-10.55,7.75) 4(-10.55,7.25) 5(-10.55,6.75) 6(-10.55,6.25) 7(-10.55,5.75) 8(-10.55,5.25) 9(-10.55,4.75) 10(-10.55,4.25) 11(-10.55,3.75) 12(-10.55,3.25) 13(-10.55,2.75) 14(-10.55,2.25) 15(-10.55,1.75) 16(-10.55,1.25) 17(-10.55,0.75) 18(-10.55,0.25) 19(-10.55,-0.25) 20(-10.55,-0.75) 21(-10.55,-1.25) 22(-10.55,-1.75) 23(-10.55,-2.25) 24(-10.55,-2.75) 25(-10.55,-3.25) 26(-10.55,-3.75) 27(-10.55,-4.25) 28(-10.55,-4.75) 29(-10.55,-5.25) 30(-10.55,-5.75) 31(-10.55,-6.25) 32(-10.55,-6.75) 33(-10.55,-7.25) 34(-10.55,-7.75) 35(-10.55,-8.25) 36(-10.55,-8.75) 73(10.55,-8.75) 74(10.55,-8.25) 75(10.55,-7.75) 76(10.55,-7.25) 77(10.55,-6.75) 78(10.55,-6.25) 79(10.55,-5.75) 80(10.55,-5.25) 81(10.55,-4.75) 82(10.55,-4.25) 83(10.55,-3.75) 84(10.55,-3.25) 85(10.55,-2.75) 86(10.55,-2.25) 87(10.55,-1.75) 88(10.55,-1.25) 89(10.55,-0.75) 90(10.55,-0.25) 91(10.55,0.25) 92(10.55,0.75) 93(10.55,1.25) 94(10.55,1.75) 95(10.55,2.25) 96(10.55,2.75) 97(10.55,3.25) 98(10.55,3.75) 99(10.55,4.25) 100(10.55,4.75) 101(10.55,5.25) 102(10.55,5.75) 103(10.55,6.25) 104(10.55,6.75) 105(10.55,7.25) 106(10.55,7.75) 107(10.55,8.25) 108(10.55,8.75)
  oval 0.3x1.8 smd: 37(-8.75,-10.55) 38(-8.25,-10.55) 39(-7.75,-10.55) 40(-7.25,-10.55) 41(-6.75,-10.55) 42(-6.25,-10.55) 43(-5.75,-10.55) 44(-5.25,-10.55) 45(-4.75,-10.55) 46(-4.25,-10.55) 47(-3.75,-10.55) 48(-3.25,-10.55) 49(-2.75,-10.55) 50(-2.25,-10.55) 51(-1.75,-10.55) 52(-1.25,-10.55) 53(-0.75,-10.55) 54(-0.25,-10.55) 55(0.25,-10.55) 56(0.75,-10.55) 57(1.25,-10.55) 58(1.75,-10.55) 59(2.25,-10.55) 60(2.75,-10.55) 61(3.25,-10.55) 62(3.75,-10.55) 63(4.25,-10.55) 64(4.75,-10.55) 65(5.25,-10.55) 66(5.75,-10.55) 67(6.25,-10.55) 68(6.75,-10.55) 69(7.25,-10.55) 70(7.75,-10.55) 71(8.25,-10.55) 72(8.75,-10.55) 109(8.75,10.55) 110(8.25,10.55) 111(7.75,10.55) 112(7.25,10.55) 113(6.75,10.55) 114(6.25,10.55) 115(5.75,10.55) 116(5.25,10.55) 117(4.75,10.55) 118(4.25,10.55) 119(3.75,10.55) 120(3.25,10.55) 121(2.75,10.55) 122(2.25,10.55) 123(1.75,10.55) 124(1.25,10.55) 125(0.75,10.55) 126(0.25,10.55) 127(-0.25,10.55) 128(-0.75,10.55) 129(-1.25,10.55) 130(-1.75,10.55) 131(-2.25,10.55) 132(-2.75,10.55) 133(-3.25,10.55) 134(-3.75,10.55) 135(-4.25,10.55) 136(-4.75,10.55) 137(-5.25,10.55) 138(-5.75,10.55) 139(-6.25,10.55) 140(-6.75,10.55) 141(-7.25,10.55) 142(-7.75,10.55) 143(-8.25,10.55) 144(-8.75,10.55)
  silkscreen extent -10.67,-9.25 9.25,9.57, body extent -10,-10 10,10, height 1.6
TSSOP28 [mm] "Shrink Small Outline; 28 Leads; Body Width 4.4 mm; Pitch 0.65 mm"
  rect 0.3x1.65 smd: 1(-4.225,-2.775) 2(-3.575,-2.775) 3(-2.925,-2.775) 4(-2.275,-2.775) 5(-1.625,-2.775) 6(-0.975,-2.775) 7(-0.325,-2.775) 8(0.325,-2.775) 9(0.975,-2.775) 10(1.625,-2.775) 11(2.275,-2.775) 12(2.925,-2.775) 13(3.575,-2.775) 14(4.225,-2.775) 15(4.225,2.775) 16(3.575,2.775) 17(2.925,2.775) 18(2.275,2.775) 19(1.625,2.775) 20(0.975,2.775) 21(0.325,2.775) 22(-0.325,2.775) 23(-0.975,2.775) 24(-1.625,2.775) 25(-2.275,2.775) 26(-2.925,2.775) 27(-3.575,2.775) 28(-4.225,2.775)
  silkscreen extent -5.05,-2.9 4.9,1.55
WSO20_M [mm] "SOIC, 20-Leads, Body 12.8x7.5mm, Pitch 1.27mm, IPC Low Density"
  oval 2.6x0.7 smd: 1(-4.6,5.715) 2(-4.6,4.445) 3(-4.6,3.175) 4(-4.6,1.905) 5(-4.6,0.635) 6(-4.6,-0.635) 7(-4.6,-1.905) 8(-4.6,-3.175) 9(-4.6,-4.445) 10(-4.6,-5.715) 11(4.6,-5.715) 12(4.6,-4.445) 13(4.6,-3.175) 14(4.6,-1.905) 15(4.6,-0.635) 16(4.6,0.635) 17(4.6,1.905) 18(4.6,3.175) 19(4.6,4.445) 20(4.6,5.715)
  silkscreen extent -4.72,-6.5 2.9,6.74, body extent -3.75,-6.5 3.75,6.5, height 2.65

## Part data
ADM1: "+3 V, Voltage Monitoring uP Supervisory Circuit"
C1 C2 C3 C4 C5 C6 C7 C8 C9 C10 C11 C13 C14 C15 C17 C20 C21 C23 C24 C27 C28 C29 C30 C31 C32 C33 C34 C35 C36 C37 C38 C39 C40 C41 C42 C43 C44 C45 C46 C47 C48 C49 C50 C51 C52 C53 C54 C55 C56 C57 C58 C59 C60 C61 C62 C63 C64 C65 C66 C67 C70 C71 C74 C75 C76 C77 C78 C79 C80 C81 C82 C83 C84 C87 C90 C93 C94 C95 C96 C97 C98 C99 C100 C101 C102 C103 C104 C105 C106 C107 C108 C109 C110 C111 C112 C113: "Capacitor (Semiconductor SIM Model)"
C12 C16 C18 C19 C22 C25 C26 C68 C69 C72 C73 C85 C86 C88 C89 C91 C92 C114: "Polarized Capacitor (Surface Mount)"
D1: library part Diode, "Default Diode"
D2 D4 D5 D6: "Typical BLUE SiC LED"
D3: library part DL4742A, "Silicon Zener Diode"
E1: library part EEPROM_25_256
EPCS1: "EPCS4 Series, In-system programmable 3.3V serial configuration device, 8-Pin SOIC, 4-Megabit, Industrial Grade, Pb-Free"
F1: "Fuse"
J1: "USB 1.1, Right Angle, Thru-Hole, Reverse Type, Receptacle, 4 Position, Black"
J2: "JTAG Header for DSP 5509"
J3 J4 J5 J6: library part "Phonejack3 RN", "Jack Socket, 1/4\" [6.5mm], Thru-Hole, Vertical, 3-Conductor with Tip open & Ring closed"
J7: "Low Voltage Power Supply Connector"
J8: "Receptacle Assembly, 9 Position, Right Angle"
JTAG_FPGA1: "Header, 5-Pin, Dual row"
MAX1: "+5V-Powered, Multichannel RS-232 Driver/Receiver"
P1: "Header, 9-Pin, Dual row"
P2: "Header, 9-Pin, Right Angle"
R1 R2 R3 R4 R5 R6 R7 R8 R9 R10 R11 R12 R13 R14 R15 R16 R17 R18 R19 R20 R21 R22 R23 R24 R25 R26 R27 R28 R29 R30 R31 R32 R33 R34 R35 R36 R37 R38 R39 R40 R41 R42 R43 R44 R45 R46 R47 R48 R49 R50 R51 R52 R53 R54 R55 R56 R57 R58 R59 R60 R61 R62 R63 R64 R65 R66 R67 R68 R69 R70 R71 R72 R73 R74 R75 R76 R77 R78 R79 R80 R81 R82 R83 R84 R85 R86 R87 R88 R89 R90 R91 R92 R93 R94 R95 R96 R97 R98 R99 R100 R101 R102 R103 R104 R105 R106 R107 R108 R109 R110 R111 R112 R113 R114 R115 R116 R117 R118 R119 R120 R121 R122 R123 R124 R125 R126 R127 R128 R129 R130 R131 R132 R133 R134 R135 R136 R137: "Resistor"
"REG 1": "1.5A, 3.3V Fixed Low Dropout Linear Regulator"
"REG 2": "1A 1.2V Low Dropout Linear Regulator"
"REG 3" "REG 5": "Three-Terminal Adjustable Output Positive Voltage Regulator"
"REG 4": library part LM317MDT, "Three-Terminal Adjustable Output Positive Voltage Regulator"
S1: "DIP Switch, 4 Position, SPST"
S2: "Switch"
S3: "Single-Pole, Single-Throw Switch"
U2: "Cyclone III Family FPGA, 94 I/O Pins, 4 PLLs, 144-Pin EQFP, Speed Grade 8, Commercial Grade, Pb-Free"
Y1: "Surface Mount Quartz Crystal"

## Via types
v1: diameter 25.98, hole 12.99, Top Layer to Bottom Layer, tented top, 16 vias

## Nets (pads, with @x,y where several pads share a name; then routed paths per layer and width w, separated by ;. In a path a pad name is that pad's centre, name@x,y a point inside that pad or via, vN(x,y) a via of type N, cw(c..) or ccw(c..) an arc to the next point about the centre after c; other vN are vias at no path point)
+3.3V: "REG 1.3" ADM1.2 C8.1 C9.1 C17.1 C29.1 C30.1 C31.1 C32.2 C33.2 C34.1 C35.1 C36.1 C37.1 C38.1 C39.1 C40.1 C41.1 C42.1 C43.1 C44.1 C45.1 C46.1 C47.1 C48.1 C49.1 C50.1 C51.1 C52.1 C53.1 C54.1 C55.2 C68.1 C70.1 C71.1 C84.1 C114.2 D5.1 D6.1 E1.7 E1.8 EPCS1.3 EPCS1.7 EPCS1.8 J2.5 MAX1.7 P1.1 R10.2 R11.2 R12.2 R13.2 R14.2 R15.2 R16.2 R17.2 R25.1 R110.1 R111.1 R112.1 U1.5 U1.8 U1.24 U1.49 U1.56 U1.72 U1.88 U1.98 U1.104 U1.107 U1.126 U1.139 U2.17 U2.26 U2.40 U2.47 U2.56 U2.62 U2.81 U2.93 U2.117 U2.122 U2.130 U2.139 uSD1.4 Y1.1 Y1.4
+5V: "REG 1.1" "REG 2.1" "REG 3.3" "REG 4.4" "REG 5.3" C69.1 C73.1 C85.1 C88.1 C91.1 R61.2
A0: R83.2 U2.64
A1: R85.2 U2.65
A2: R87.2 U2.66
A3: R88.2 U2.67
A4: R89.2 U2.68
A5: R90.2 U2.69
A6: R91.2 U2.70
A7: R93.2 U2.71
A8: R94.2 U2.72
A9: R95.2 U2.73
A10: R96.2 U2.74
A11: R98.2 U2.75
A12: R100.2 U2.76
A13: R101.2 U2.77
AIC3.3V: AIC1.1 AIC1.8 AIC1.14 AIC1.27 C11.1 C12.1 C13.1 C14.1 C15.1 C16.1 C18.1 R24.2 R30.2 R31.2 R42.1 R43.1 R46.1 R47.1
AOE: R82.1 U2.106
ARDY: U1.20 U2.103
ARE: R84.1 U2.105
AWE: R86.1 U2.104
BE0: R97.1 U2.100
BE1: R99.1 U2.99
CE2: R92.1 U2.101
CLK3: U2.25 U2.28
CLK4: U2.83 U2.91
CLK5: U2.84 U2.90
CLK6: U2.85 U2.89
CLK7: U2.86 U2.88
CLK12MHZ: R53.1 U2.22 Y1.3
CLKMEM: R81.1 U2.98
D0: R65.1 U2.60
D1: R67.1 U2.59
D2: R69.1 U2.58
D3: R71.1 U2.55
D4: R73.1 U2.54
D5: R75.1 U2.53
D6: R77.1 U2.52
D7: R79.1 U2.51
D8: R66.2 U2.50
D9: R68.2 U2.49
D10: R70.2 U2.46
D11: R72.2 U2.44
D12: R74.2 U2.43
D13: R76.2 U2.42
D14: R78.2 U2.39
D15: R80.2 U2.38
DSP_CVCC: "REG 3.4" C56.2 C57.1 C58.1 C59.1 C60.1 C61.1 C62.1 C63.1 C64.1 C65.1 C66.1 C67.1 C86.1 R57.2 U1.18 U1.29 U1.30 U1.41 U1.53 U1.68 U1.78 U1.83 U1.87 U1.118 U1.132
FPGA_VCCA_2.5V: "REG 5.4" C92.1 FB13.2 JTAG_FPGA1.4 R63.2 R104.2 R106.2 U2.96
FPGA_VINT_1.2V: "REG 2.3" C72.1 C74.1 C75.1 C76.1 C77.1 C78.1 C79.1 C80.1 C81.1 C82.1 C83.1 C87.2 C90.2 C93.1 FB2.1 FB14.2 U1.109 U1.110 U2.5 U2.29 U2.45 U2.61 U2.78 U2.102 U2.116 U2.134
GND: "REG 1.4" "REG 2.4" ADM1.3 ADM1.4 AIC1.21 AIC1.22 AIC1.28 C1.2 C4.2 C5.2 C6.2 C7.2 C8.2 C9.2 C13.2 C14.2 C16.2 C17.2 C29.2 C30.2 C31.2 C32.1 C33.1 C34.2 C35.2 C36.2 C37.2 C38.2 C39.2 C40.2 C41.2 C42.2 C43.2 C44.2 C45.2 C46.2 C47.2 C48.2 C49.2 C50.2 C51.2 C52.2 C53.2 C54.2 C55.1 C56.1 C57.2 C58.2 C59.2 C60.2 C61.2 C62.2 C63.2 C64.2 C65.2 C66.2 C67.2 C68.2 C69.2 C70.2 C71.2 C72.2 C73.2 C74.2 C75.2 C76.2 C77.2 C78.2 C79.2 C80.2 C81.2 C82.2 C83.2 C84.2 C85.2 C86.2 C87.1 C88.2 C89.2 C90.1 C91.2 C92.2 C114.1 D1.1 D2.2 D3.1 D4.2 E1.4 EPCS1.4 FB3.1 FB4.2 FB12.2 FB15.2 J2.4 J2.8 J2.10 J2.12 J8.5 J8.10 J8.11 JTAG_FPGA1.2 JTAG_FPGA1.10 MAX1.6 MAX1.9 P1.2 R6.2 R7.2 R8.2 R18.1 R19.1 R20.1 R21.1 R42.2 R43.2 R54.1 R55.1 R56.1 R58.1 R59.1 R62.1 R64.1 R109.2 S2.1 U1.1 U1.7 U1.11 U1.33 U1.36 U1.37 U1.45 U1.60 U1.64 U1.73 U1.100 U1.102 U1.103 U1.108 U1.112 U1.113 U1.114 U1.115 U1.122 U1.138 U1.144 U2.19 U2.21 U2.27 U2.41 U2.48 U2.57 U2.63 U2.82 U2.94 U2.95 U2.97 U2.118 U2.123 U2.131 U2.140 U2.145 uSD1.6 Y1.2
  other v1: 8619.13,1654.13 8666.38,1654.13 8713.62,1654.13 8760.87,1654.13 8619.13,1701.38 8666.38,1701.38 8713.62,1701.38 8760.87,1701.38 8619.13,1748.62 8666.38,1748.62 8713.62,1748.62 8760.87,1748.62 8619.13,1795.87 8666.38,1795.87 8713.62,1795.87 8760.87,1795.87
GND_AIC: AIC1.11 AIC1.15 C11.2 C12.2 C15.2 C18.2 C20.2 C21.2 C22.2 FB12.1 J3.4 J3.5 J4.5 J5.5 J6.5 R40.1 R41.1 R44.1 R45.1 R50.1 R51.1
NetADM1_1: ADM1.1 S2.2
NetADM1_7: ADM1.7 U1.91 U2.87
NetAIC1_3: AIC1.3 R38.1
NetAIC1_4: AIC1.4 R29.1
NetAIC1_5: AIC1.5 R36.1
NetAIC1_6: AIC1.6 R39.1
NetAIC1_7: AIC1.7 R35.1
NetAIC1_9: AIC1.9 C26.1
NetAIC1_10: AIC1.10 C25.1
NetAIC1_12: AIC1.12 C27.2
NetAIC1_13: AIC1.13 C28.2
NetAIC1_16: AIC1.16 C21.1 C22.1
NetAIC1_17: AIC1.17 R26.1
NetAIC1_18: AIC1.18 R28.1
NetAIC1_19: AIC1.19 C23.1
NetAIC1_20: AIC1.20 C24.1
NetAIC1_23: AIC1.23 R46.2 U1.89
NetAIC1_24: AIC1.24 R47.2 U1.90
NetC1_1: C1.1 D1.2 FB1.1 R2.1
NetC2_1: C2.1 R5.1 U1.95
NetC2_2: C2.2 C3.2 FB4.1 U1.92
NetC3_1: C3.1 FB2.2 R5.2
NetC4_1: C4.1 J1.3 R1.1 R3.1 R7.1
NetC5_1: C5.1 J1.2 R4.1 R8.1
NetC6_1: C6.1 R4.2 U1.4
NetC7_1: C7.1 R3.2 U1.3
NetC10_1: C10.1 FB3.2 J1.4 R9.2
NetC10_2: C10.2 J1.5 J1.6 R9.1
NetC19_1: C19.1 R28.2
NetC19_2: C19.2 C20.1 FB5.1 R26.2
NetC23_2: C23.2 R34.2 R41.2
NetC24_2: C24.2 R37.2 R40.2
NetC25_2: C25.2 FB8.2 R44.2
NetC26_2: C26.2 FB9.2 R45.2
NetC27_1: C27.1 R48.1
NetC28_1: C28.1 R49.1
NetC89_1: "REG 4.3" C89.1 D3.2 F1.2 R60.2
NetC93_2: C93.2 C94.2 C95.2 C96.2 C97.2 C98.2 C99.2 C100.2 C101.2 C102.2 C103.2 C104.2 C105.2 C106.2 C107.2 C108.2 C109.2 C110.2 C111.2 C112.2 C113.2 FB15.1 U2.36 U2.108
NetC94_1: C94.1 C95.1 C96.1 C97.1 C98.1 C99.1 C100.1 C101.1 C102.1 C103.1 C104.1 FB14.1 U2.37 U2.109
NetC105_1: C105.1 C106.1 C107.1 C108.1 C109.1 C110.1 C111.1 C112.1 C113.1 FB13.1 U2.35 U2.107
NetD2_1: D2.1 R52.1
NetD4_1: D4.1 R60.1
NetD5_2: D5.2 R102.1
NetD6_2: D6.2 R103.1
NetE1_1: E1.1 R27.2
NetE1_2: E1.2 U1.135
NetE1_3: E1.3 R25.2
NetE1_5: E1.5 U1.131
NetE1_6: E1.6 R22.2 R23.2
NetEPCS1_1: EPCS1.1 U2.8
NetEPCS1_2: EPCS1.2 U2.13
NetEPCS1_5: EPCS1.5 U2.6
NetF1_1: F1.1 S3.2
NetFB1_2: FB1.2 J1.1
NetFB5_2: FB5.2 J3.1 J3.3
NetFB6_1: FB6.1 R34.1
NetFB6_2: FB6.2 J4.1
NetFB7_1: FB7.1 R37.1
NetFB7_2: FB7.2 J4.3
NetFB8_1: FB8.1 J5.1
NetFB9_1: FB9.1 J5.3
NetFB10_1: FB10.1 J6.1
NetFB10_2: FB10.2 R48.2 R51.2
NetFB11_1: FB11.1 J6.3
NetFB11_2: FB11.2 R49.2 R50.2
NetJ2_1: J2.1 R10.1 U1.86
NetJ2_2: J2.2 U1.84
NetJ2_3: J2.3 R11.1 U1.82
NetJ2_7: J2.7 U1.81
NetJ2_9: J2.9 J2.11 U1.85
NetJ2_13: J2.13 R12.1 U1.79
NetJ2_14: J2.14 R13.1 U1.80
NetJ7_1: J7.1 J7.1A J7.1B S3.1
NetJ7_2: J7.2 J7.2A J7.2B J7.3 J7.3A J7.3B
NetJ8_2: J8.2 MAX1.18
NetJ8_3: J8.3 MAX1.19
NetJ8_4: J8.4 J8.6
NetJ8_7: J8.7 J8.8
NetJTAG_FPGA1_1: JTAG_FPGA1.1 R109.1 U2.16
NetJTAG_FPGA1_3: JTAG_FPGA1.3 R107.2
NetJTAG_FPGA1_5: JTAG_FPGA1.5 R106.1 U2.18
NetJTAG_FPGA1_9: JTAG_FPGA1.9 R108.2
NetMAX1_1: MAX1.1 R102.2 U2.1
NetMAX1_10: MAX1.10 MAX1.16
NetMAX1_11: MAX1.11 MAX1.15
NetMAX1_12: MAX1.12 MAX1.17
NetMAX1_20: MAX1.20 R103.2 R105.2
NetP1_3: P1.3 R121.2
NetP1_4: P1.4 R120.2
NetP1_5: P1.5 R122.2
NetP1_6: P1.6 R119.2
NetP1_7: P1.7 R123.2
NetP1_8: P1.8 R118.2
NetP1_9: P1.9 R124.2
NetP1_10: P1.10 R117.2
NetP1_11: P1.11 R125.2
NetP1_12: P1.12 R116.2
NetP1_13: P1.13 R126.2
NetP1_14: P1.14 R115.2
NetP1_15: P1.15 R127.2
NetP1_16: P1.16 R114.2
NetP1_17: P1.17 R128.2
NetP1_18: P1.18 R113.2
NetP2_1: P2.1 R129.2
NetP2_2: P2.2 R130.2
NetP2_3: P2.3 R131.2
NetP2_4: P2.4 R132.2
NetP2_5: P2.5 R133.2
NetP2_6: P2.6 R134.2
NetP2_7: P2.7 R135.2
NetP2_8: P2.8 R136.2
NetP2_9: P2.9 R137.2
NetR1_2: R1.2 U1.2
NetR2_2: R2.2 R6.1 U1.6
NetR14_1: R14.1 S1.8 U1.12
NetR15_1: R15.1 S1.7 U1.10
NetR16_1: R16.1 S1.6 U1.9
NetR17_1: R17.1 S1.5 U1.143
NetR18_2: R18.2 S1.1
NetR19_2: R19.2 S1.2
NetR20_2: R20.2 S1.3
NetR21_2: R21.2 S1.4
NetR22_1: R22.1 U1.137
NetR23_1: R23.1 U1.134
NetR24_1: R24.1 U1.124
NetR27_1: R27.1 U1.142
NetR30_1: R30.1 R32.1 R33.1 R38.2
NetR31_1: R31.1 R36.2 U1.125
NetR32_2: R32.2 U1.130
NetR33_2: R33.2 U1.127
NetR35_2: R35.2 U1.129
NetR39_2: R39.2 U1.128
NetR52_2: R52.2 U1.101
NetR53_2: R53.2 R54.2 U1.13
NetR55_2: R55.2 U1.105
NetR56_2: R56.2 U1.106
NetR57_1: "REG 3.1" R57.1 R58.2 R59.2
NetR61_1: "REG 4.1" R61.1 R62.2
NetR63_1: "REG 5.1" R63.1 R64.2
NetR65_2: R65.2 U1.57
NetR66_1: R66.1 U1.67
NetR67_2: R67.2 U1.58
NetR68_1: R68.1 U1.69
NetR69_2: R69.2 U1.59
NetR70_1: R70.1 U1.70
NetR71_2: R71.2 U1.61
NetR72_1: R72.1 U1.71
NetR73_2: R73.2 U1.62
NetR74_1: R74.1 U1.74
NetR75_2: R75.2 U1.63
NetR76_1: R76.1 U1.75
NetR77_2: R77.2 U1.65
NetR78_1: R78.1 U1.76
NetR79_2: R79.2 U1.66
NetR80_1: R80.1 U1.77
NetR81_2: R81.2 U1.31
NetR82_2: R82.2 U1.17
NetR83_1: R83.1 U1.55
NetR84_2: R84.2 U1.16
NetR85_1: R85.1 U1.54
NetR86_2: R86.2 U1.19
NetR87_1: R87.1 U1.52
NetR88_1: R88.1 U1.51
NetR89_1: R89.1 U1.50
NetR90_1: R90.1 U1.48
NetR91_1: R91.1 U1.47
NetR92_2: R92.2 U1.23
NetR93_1: R93.1 U1.46
NetR94_1: R94.1 U1.44
NetR95_1: R95.1 U1.43
NetR96_1: R96.1 U1.42
NetR97_2: R97.2 U1.26
NetR98_1: R98.1 U1.40
NetR99_2: R99.2 U1.27
NetR100_1: R100.1 U1.39
NetR101_1: R101.1 U1.38
NetR104_1: R104.1 R108.1 U2.15
NetR105_1: R105.1 U2.2
NetR107_1: R107.1 U2.20
NetR110_2: R110.2 U2.92
NetR111_2: R111.2 U2.14
NetR112_2: R112.2 U2.9
NetR113_1: R113.1 U2.144
NetR114_1: R114.1 U2.143
NetR115_1: R115.1 U2.142
NetR116_1: R116.1 U2.141
NetR117_1: R117.1 U2.138
NetR118_1: R118.1 U2.137
NetR119_1: R119.1 U2.136
NetR120_1: R120.1 U2.135
NetR121_1: R121.1 U2.133
NetR122_1: R122.1 U2.132
NetR123_1: R123.1 U2.129
NetR124_1: R124.1 U2.128
NetR125_1: R125.1 U2.127
NetR126_1: R126.1 U2.126
NetR127_1: R127.1 U2.125
NetR128_1: R128.1 U2.124
NetR129_1: R129.1 U2.121
NetR130_1: R130.1 U2.120
NetR131_1: R131.1 U2.119
NetR132_1: R132.1 U2.115
NetR133_1: R133.1 U2.114
NetR134_1: R134.1 U2.113
NetR135_1: R135.1 U2.112
NetR136_1: R136.1 U2.111
NetR137_1: R137.1 U2.110
NetU1_93: U1.93 U2.34
NetU1_94: U1.94 U2.33
NetU1_96: U1.96 U2.32
NetU1_97: U1.97 U2.31
NetU1_99: U1.99 U2.30
NetU1_116: U1.116 uSD1.5
NetU1_117: U1.117 uSD1.2
NetU1_119: U1.119 uSD1.7
NetU1_120: U1.120 uSD1.8
NetU1_121: U1.121 uSD1.1
NetU1_123: U1.123 uSD1.3
NetU2_3: U2.3 U2.24
NetU2_4: U2.4 U2.23
pads on no net: "REG 1.2" "REG 2.2" ADM1.5 ADM1.6 ADM1.8 AIC1.2 AIC1.25 AIC1.26 EPCS1.6 J2.6 J3.MH1 J4.4 J4.MH1 J5.4 J5.MH1 J6.4 J6.MH1 J8.1 J8.9 JTAG_FPGA1.6 JTAG_FPGA1.7 JTAG_FPGA1.8 MAX1.2 MAX1.3 MAX1.4 MAX1.5 MAX1.8 MAX1.13 MAX1.14 R29.2 U1.14 U1.15 U1.21 U1.22 U1.25 U1.28 U1.32 U1.34 U1.35 U1.111 U1.133 U1.136 U1.140 U1.141 U2.7 U2.10 U2.11 U2.12 U2.79 U2.80 uSD1.9 uSD1.10 uSD1.11 uSD1.12

## Keep-outs
Keep-Out Layer:
  lines w10: 1090,4905 1090,1100 6900,1100 6905,1105 6905,4895 6895,4905 1100,4905

## Text inside footprints (layer, text, board x,y; h text height)
J2: Top Overlay "2" at 8320,4240 h50 r90; Top Overlay "1" at 8420,4240 h50 r90; Top Overlay "14" at 8320,5040 h50 r90; Top Overlay "13" at 8420,5040 h50 r90
J3: Mechanical 1 "Alert PCB fab to slot details" at 21178.98,3045.31 h11.81; Mechanical 1 "Slot 1.2x2.5mm, PTH" at 21178.98,3025.63 h11.81; Mechanical 1 "Assign keep-out area to slot" at 21178.98,3065 h11.81; Mechanical 1 "Mech 1 - Slot cut-out" at 21178.98,3005.94 h11.81; Mechanical 1 "Mech 2 - Clearance, move to internal plane if present" at 21178.98,2986.26 h11.81
J4: Mechanical 1 "Alert PCB fab to slot details" at 17678.98,3045.31 h11.81; Mechanical 1 "Slot 1.2x2.5mm, PTH" at 17678.98,3025.63 h11.81; Mechanical 1 "Assign keep-out area to slot" at 17678.98,3065 h11.81; Mechanical 1 "Mech 1 - Slot cut-out" at 17678.98,3005.94 h11.81; Mechanical 1 "Mech 2 - Clearance, move to internal plane if present" at 17678.98,2986.26 h11.81
J5: Mechanical 1 "Alert PCB fab to slot details" at 13803.98,3045.31 h11.81; Mechanical 1 "Slot 1.2x2.5mm, PTH" at 13803.98,3025.63 h11.81; Mechanical 1 "Assign keep-out area to slot" at 13803.98,3065 h11.81; Mechanical 1 "Mech 1 - Slot cut-out" at 13803.98,3005.94 h11.81; Mechanical 1 "Mech 2 - Clearance, move to internal plane if present" at 13803.98,2986.26 h11.81
J6: Mechanical 1 "Alert PCB fab to slot details" at 11133.98,3045.31 h11.81; Mechanical 1 "Slot 1.2x2.5mm, PTH" at 11133.98,3025.63 h11.81; Mechanical 1 "Assign keep-out area to slot" at 11133.98,3065 h11.81; Mechanical 1 "Mech 1 - Slot cut-out" at 11133.98,3005.94 h11.81; Mechanical 1 "Mech 2 - Clearance, move to internal plane if present" at 11133.98,2986.26 h11.81
J7: Mechanical 1 "Mech 2 - Clearance, move to internal plane if present" at 10770.56,6971.26 h11.81 r90; Mechanical 1 "Mech 1 - Slot cut-out" at 10750.87,6971.26 h11.81 r90; Mechanical 1 "Assign keep-out area to slot" at 10711.5,6971.26 h11.81 r90; Mechanical 1 "Alert PCB fab to slot details" at 10731.18,6971.26 h11.81 r90
J8: Top Overlay "6" at 12850.87,1391.73 h59.06 r90; Top Overlay "9" at 12850.87,1718.9 h59.06 r90; Top Overlay "5" at 13220.94,1773.43 h59.06 r90; Top Overlay "1" at 13220.94,1347.05 h59.06 r90
JTAG_FPGA1: Top Overlay "10" at 10115,2095 h50 r90; Top Overlay "9" at 10215,2095 h50 r90; Top Overlay "1" at 10215,1555 h50 r90; Top Overlay "2" at 10115,1535 h50 r90
P1: Top Overlay "17" at 11120,6827.76 h39.37 r90; Top Overlay "1" at 11120,6312.01 h39.37 r90